# Altium PCB PCB1.PcbDoc
Units mil, origin at the board's own origin, x right, y up, seen from the top; angles counter-clockwise.
Board outline 2150 x 1345 mil, 2 copper layers (Top Layer, Bottom Layer); 18 components, 12 nets, 44 pads, 0 vias.
Unrouted connection lines stored in the file: 1.
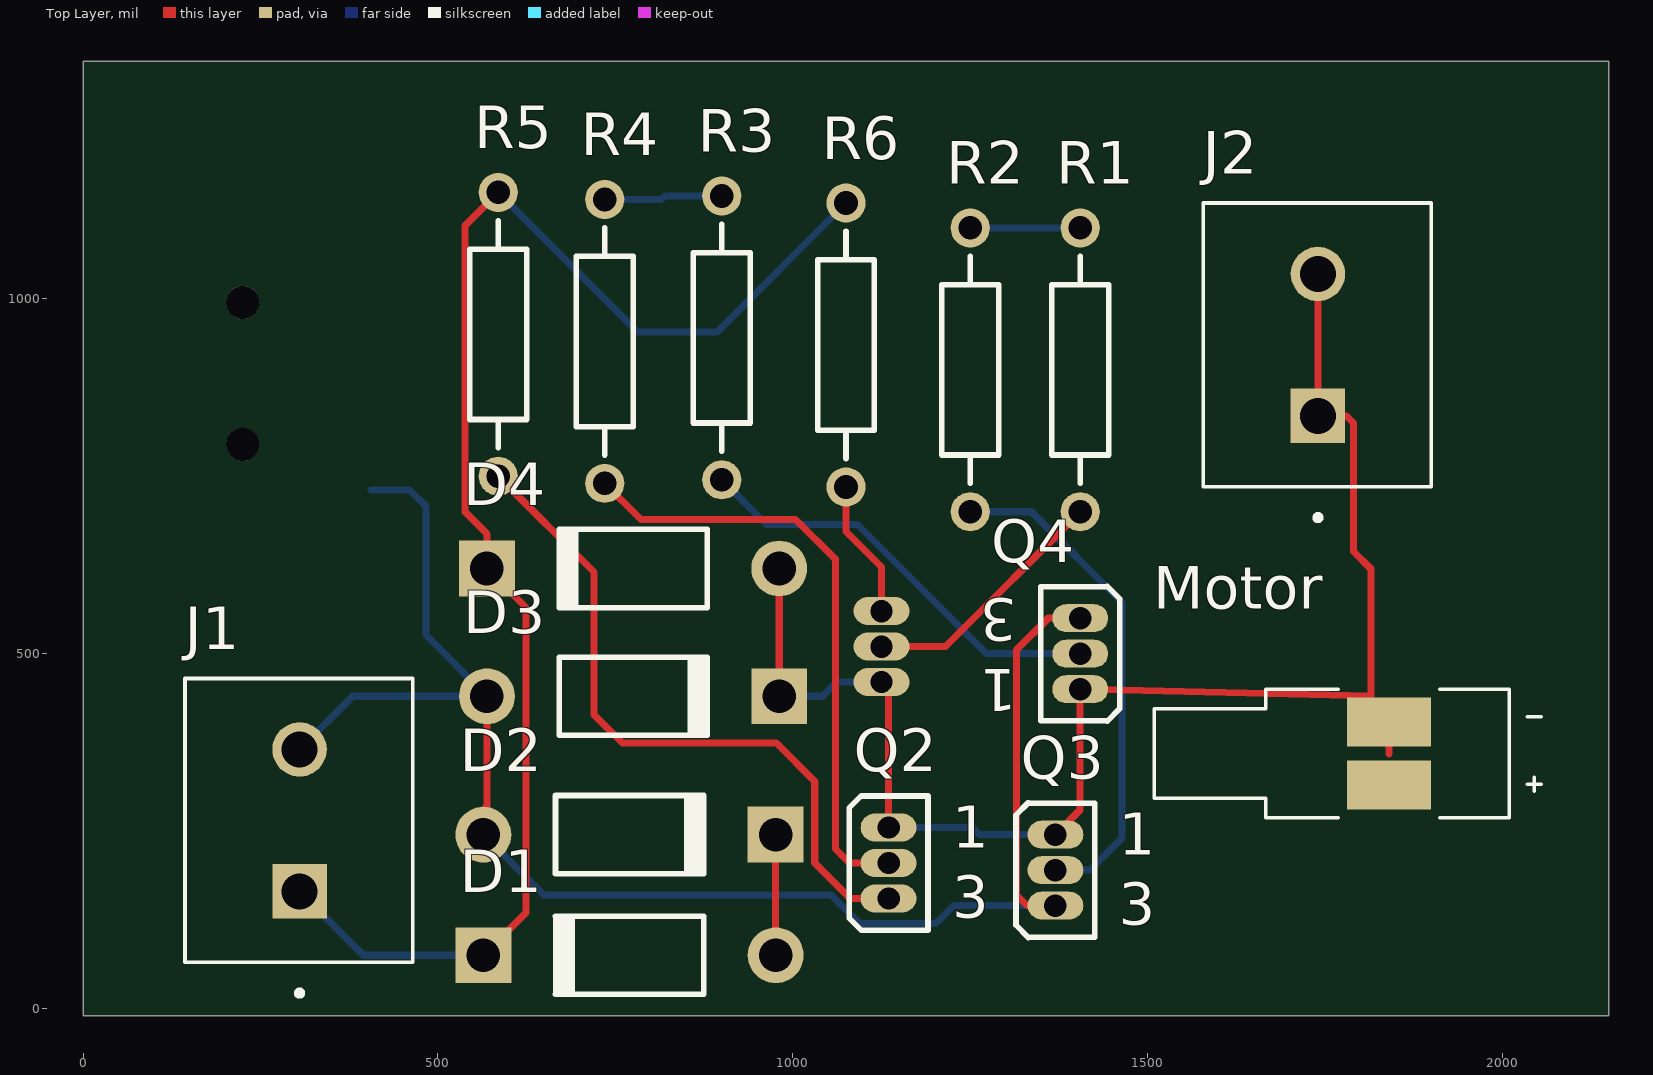
[diagram p0: Top Layer view]
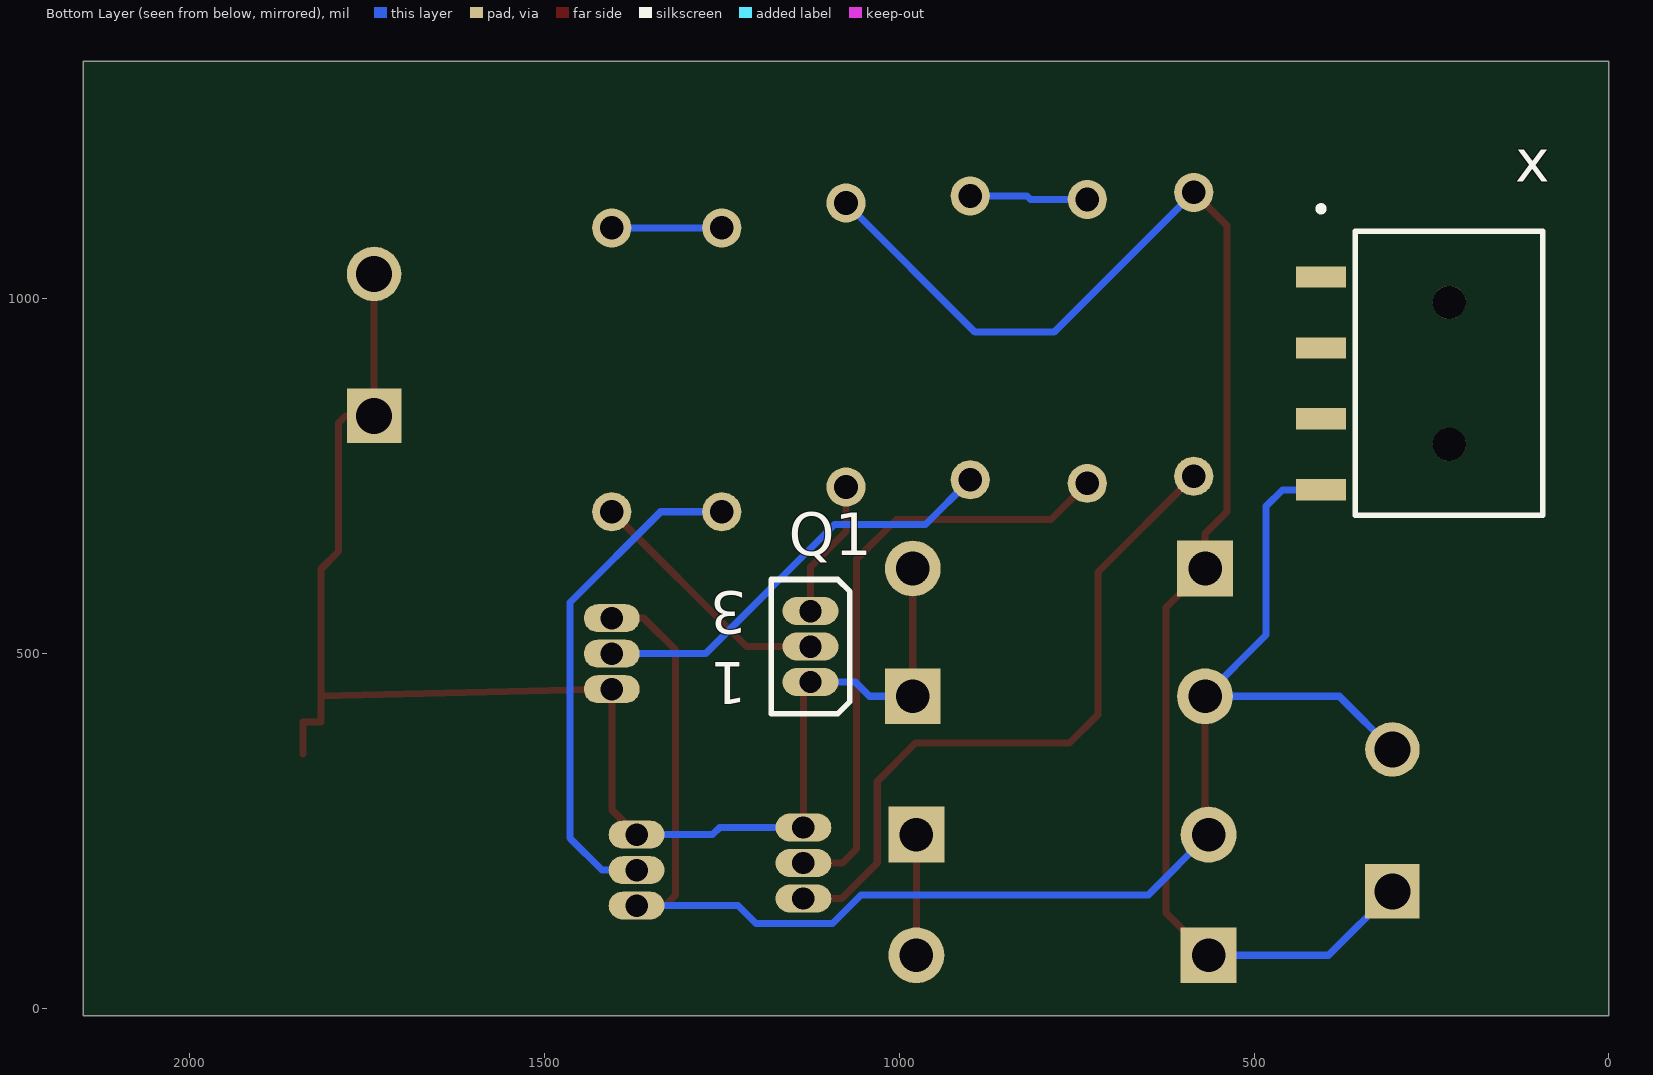
[diagram p1: Bottom Layer view, seen from below]

## Layer stack, top to bottom
Top Solder: solder mask 0.4, Solder Resist, Dk 3.5
Top Layer: signal copper 1.4
Dielectric 1: dielectric 12.6, FR-4, Dk 4.8
Bottom Layer: signal copper 1.4
Bottom Solder: solder mask 0.4, Solder Resist, Dk 3.5

## Board outline
2150,-10 2150,1335 0,1335 0,-10

## Design rules (kind name [scope] priority, off if disabled: settings)
Clearance [All] p1: gap=10 ignorepadtopadclearanceinfootprint=FALSE except(0: Arc-Hole Track-Hole SMDPad-Hole THPad-Hole Via-Hole Fill-Hole Poly-Hole Region-Hole Text-Hole)
PolygonConnect [All] p1: connectstyle=Relief reliefconductorwidth=10 reliefentries=4 polygonreliefangle="90 Angle" airgapwidth=10
RoutingVias [All] p1: holewidth=28 width=50 viastyle="Through Hole" minholewidth=28 minwidth=50 maxholewidth=28 maxwidth=50
SolderMaskExpansion [All] p1: expansion=4 istentingtop=FALSE
Width [All] p1: maxlimit=10 minlimit=10 preferedwidth=10
30 further rules are at their usual default settings.

## Classes and differential pairs
component class H_Bridge: D1 D2 D4 J1 J2 Motor Q1 Q2 Q3 Q4 R1 R2 R3 R4 R5 R6 x

## Components (designator, comment, footprint, x,y, rotation, side; value= is the part's Value field where it differs from the comment)
D1 "Diode 1N4007" DO-41 770,75 r180 top
D2 "Diode 1N4007" DO-41 770,245 r0 top
D3 "Diode 1N4007" DO-41 775,440 r0 top
D4 "Diode 1N4007" DO-41 775,620 r180 top
J1 "1729128" PHOENIX_1729128 464.45,65 r90 top
J2 "1729128" PHOENIX_1729128 1899.45,735 r90 top
Motor "HD-EMB1305-SC" PUI_HD-EMB1305-SC 1840,359.29 r0 top
Q1 "MOSFET-P" E3 1125,510 r0 bottom
Q2 "MOSFET-P" E3 1135,205 r0 top
Q3 "MOSFET-N" E3 1370,195 r0 top
Q4 "MOSFET-N" E3 1405,500 r180 top
R1 "Res2" AXIAL-0.4 1405,900 r270 top value=1K
R2 "Res2" AXIAL-0.4 1250,900 r270 top value=1K
R3 "Res2" AXIAL-0.4 900,945 r90 top value=1K
R4 "Res2" AXIAL-0.4 735,940 r90 top value=1K
R5 "Res2" AXIAL-0.4 585,950 r90 top value=4.7K
R6 "Res2" AXIAL-0.4 1075,935 r90 top value=4.7K
x "SIB-104-02-F-S-LC" SAMTEC_SIB-104-02-F-S-LC 405.71,880.83 r90 bottom

## Footprints (in the part's own frame and the unit in brackets; to place one, negate y for a bottom-side part, rotate by r counter-clockwise, add the part's x,y. Pads: shape width x height; smd on the part's side, far side on the other; paste and mask are expansions set on the pad)
AXIAL-0.4 [mm] "Axial Device, Thru-Hole; 2 Leads; 0.4 in Pin Spacing"
  round 1.4 hole 0.85: 1(-5.08,0) 2(5.08,0)
  silkscreen extent -4.06,-1.02 4.06,1.02
DO-41 [mm] "Diode, Axial; Body 5.2 x 2.7 mm (LxDia. max), Lead Dia. 0.86 mm (max)"
  round 2 hole 1.2: 1(-5.23,0)
  rect 2x2 hole 1.2: 2(5.23,0)
  silkscreen extent -2.65,-1.4 2.75,1.4
E3 [mm] "TO, Flat Index; 3 In-Line, Axial Leads; Body Dia. 4.6mm; Lead Dia. 0.5 mm (max)"
  oval 2x1 hole 0.8: 1(0,1.27) 2(0,0) 3(0,-1.27)
  silkscreen extent -1.41,-2.41 1.41,2.41
PHOENIX_1729128 [mm]
  rect 1.95x1.95 / inner round 1.95 / far side rect 1.95x1.95 hole 1.3: 1(2.54,4.05)
  round 1.95 hole 1.3: 2(7.62,4.05)
  silkscreen extent -1.2,0 10.16,8.15
PUI_HD-EMB1305-SC [mm]
  rect 3x1.75 smd: N(0,1.125) P(0,-1.125)
  silkscreen extent -8.4,-2.3 5.46,2.3, body extent -2.3,-8.3 2.3,4.4, height 2.67
SAMTEC_SIB-104-02-F-S-LC [mil]
  rect 30x70 smd: 1(150,0) 2(50,0) 3(-50,0) 4(-150,0)
  round 46.85 hole 46.85 unplated: ""(-85.83,-180.71) ""(114.17,-180.71)
  silkscreen extent -186,-313 250,4

## Part data
D1 D2 D3 D4: "1 Amp General Purpose Rectifier", Code_JEDEC=DO-204-AL, ComponentLink1Description="Manufacturer Link", ComponentLink1URL=http://www.fairchildsemi.com/, ComponentLink2Description=Datasheet, ComponentLink2URL=http://www.fairchildsemi.com/ds/1N%2F1N4001.pdf, DatasheetVersion=1998, LatestRevisionDate=17-Jul-2002, LatestRevisionNote="Re-released for DXP Platform.", PackageDescription="Diode, Axial; Body 5.2 x 2.7 mm (LxDia. max), Lead Dia. 0.86 mm (max)", PackageReference=DO-41, PackageVersion=Aug-1999, Published=8-Jun-2000, Publisher="Altium Limited"
J1 J2: "PCB Terminal Screw 5.08mm 16AWG 400V 13.5A 2 Position COMBICON MKDSN Series", Package=None, Check_prices=https://www.snapeda.com/parts/1729128/Phoenix+Contact/view-part/?ref=eda, MF="Phoenix Contact", MP=1729128, SnapEDA_Link=https://www.snapeda.com/parts/1729128/Phoenix+Contact/view-part/?ref=snap
Motor: "HD MOTOR 3VDC 93OHM 13000RPM", Package=None, Check_prices=https://www.snapeda.com/parts/HD-EMB1305-SC/PUI+Audio/view-part/?ref=eda, MF="PUI Audio", MP=HD-EMB1305-SC, SnapEDA_Link=https://www.snapeda.com/parts/HD-EMB1305-SC/PUI+Audio/view-part/?ref=snap
Q1 Q2: "P-Channel MOSFET", LatestRevisionDate=17-Jul-2002, LatestRevisionNote="Re-released for DXP Platform.", PackageDescription="TO, Flat Index; 3 In-Line, Axial Leads; Body Dia. 4.6mm; Lead Dia. 0.5 mm (max)", PackageReference=E3, PackageVersion=1995/1996, Published=8-Jun-2000, Publisher="Altium Limited"
Q3 Q4: "N-Channel MOSFET", LatestRevisionDate=17-Jul-2002, LatestRevisionNote="Re-released for DXP Platform.", PackageDescription="TO, Flat Index; 3 In-Line, Axial Leads; Body Dia. 4.6mm; Lead Dia. 0.5 mm (max)", PackageReference=E3, PackageVersion=1995/1996, Published=8-Jun-2000, Publisher="Altium Limited"
R1 R2 R3 R4 R5 R6: "Resistor", LatestRevisionDate=17-Jul-2002, LatestRevisionNote="Re-released for DXP Platform.", PackageDescription="Axial Device, Thru-Hole; 2 Leads; 0.4 in Pin Spacing", PackageReference=AXIAL-0.4, Published=8-Jun-2000, Publisher="Altium Limited"
x: "SIB Series .100\" One-Piece Interface", Package=None, Availability=Unavailable, MP=SIB-104-02-F-S-LC, Price=None

## Nets (pads, with @x,y where several pads share a name; then routed paths per layer and width w, separated by ;. In a path a pad name is that pad's centre, name@x,y a point inside that pad or via, vN(x,y) a via of type N, cw(c..) or ccw(c..) an arc to the next point about the centre after c; other vN are vias at no path point)
+12: D1.2 D4.2 J1.1 R5.2 R6.2 | length 2098.3
  Top Layer w10: D1.2 624,134.91 624,565.09 D4.2 569.09,668.91 538,700 538,1103 R5.2
  Bottom Layer w10: J1.1 395,75 D1.2 ; R5.2 782,953 893,953 R6.2
GND: D2.1 D3.1 J1.2 Q3.3 Q4.3 x.4 | length 2265.4
  Top Layer w10: D2.1 564.09,280 569.09,285 D3.1 ; Q3.3 1330,145 1315,160 1315,505 1360,550 Q4.3
  Bottom Layer w10: J1.2 380,440 D3.1 483,526.09 483,707.83 460,730.83 x.4 ; D2.1 649.09,160 1054,160 1094,120 1202,120 1227,145 Q3.3
NetD1_1: D1.1 D2.2 | length 170
  Top Layer w10: D1.1 D2.2
NetD3_2: D3.2 D4.1 J2.1 J2.2 Motor.N Motor.P Q1.1 Q2.1 Q3.1 Q4.1 | length 2171.6
  Top Layer w10: D3.2 D4.1 ; Q1.1 1135,460 Q2.1 ; Q3.1 1405,280 Q4.1 1815,440.57 ; J2.2 J2.1 1780,835 1790,825 1790,644 1815,619 1815,440.57 ; 1840,359 Motor.N 1815,403.58 1815,440.57
  Bottom Layer w10: D3.2 1042,440 1062,460 Q1.1 ; Q2.1 1253,255 1263,245 Q3.1
NetQ1_2: Q1.2 R1.2 | length 358.7
  Top Layer w10: Q1.2 1215,510 R1.2
NetQ1_3: Q1.3 R6.1 | length 195.7
  Top Layer w10: R6.1 1075,672 1125,622 Q1.3
NetQ2_2: Q2.2 R4.1 | length 860.6
  Top Layer w10: R4.1 786,689 1004,689 1060,633 1060,225 1080,205 Q2.2
NetQ2_3: Q2.3 R5.1 | length 981.6
  Top Layer w10: R5.1 720,615 720,414 760,374 977,374 1031,320 1031,205 1081,155 Q2.3
NetQ3_2: Q3.2 R2.2 | length 711.7
  Bottom Layer w10: R2.2 1336,700 1464,572 1464,240 1419,195 Q3.2
NetQ4_2: Q4.2 R3.1 | length 606.5
  Bottom Layer w10: R3.1 963,682 1091,682 1273,500 Q4.2
NetR1_1: R1.1 R2.1 | length 155
  Bottom Layer w10: R2.1 R1.1
NetR3_2: R3.2 R4.2 | length 167.1
  Bottom Layer w10: R4.2 815,1140 820,1145 R3.2
pads on no net: x. x.1 x.2 x.3

## Text inside footprints (layer, text, board x,y; h text height)
Q1: Bottom Overlay "1" at 1214.57,488.15 h59.05 r180; Bottom Overlay "3" at 1214.57,587.28 h59.05 r180
Q2: Top Overlay "1" at 1224.57,226.85 h59.05; Top Overlay "3" at 1224.57,127.72 h59.05
Q3: Top Overlay "1" at 1459.57,216.85 h59.05; Top Overlay "3" at 1459.57,117.72 h59.05
Q4: Top Overlay "1" at 1315.43,478.15 h59.05 r180; Top Overlay "3" at 1315.43,577.28 h59.05 r180